# EAGLE board TinkCad_Circuit (EAGLE 9.7.0)

Size 262.16 x 178.18 mm. Coordinates in mm from the lower left corner, seen from the top.
Outline: 0,0 262.16,0 262.16,178.18 0,178.18 0,0
Copper layers (1*16): Top 0.035mm / dielectric 1.5mm / Bottom 0.035mm
Design rules "default": minimum track width 6mil, minimum drill 0.35mm, track to track 6mil, track to pad 6mil, pad to pad 6mil, via to via 6mil, smd to smd 6mil, copper to edge 40mil, drill to drill 6mil, minimum pad ring 10mil, minimum via ring 8mil, stop-mask expansion 4mil, vias tented up to drill 0mil, thermal gap 10mil

## Footprints (pad centres in the part's own frame; a part is rotated, then mirrored left to right if it is on the bottom)
LEDRD254W60D565H860B = drill 0.981 pad 1.581: 1 -1.27,0; 2 1.27,0
BATTERY-GENERIC = drill 1.118 pad 3.15 octagon: + 2.54,0; - -2.54,0
RESAD1016W63L850D250B = drill 0.83 pad 1.43: 1 -5.08,0; 2 5.08,0
SWITCH-SPDT-PTH-8.5X3.7MM = drill 1.016 pad 1.88: 1 -2.54,0; 2 0,0; 3 2.54,0
78B04ST = drill 0.8: 1 -3.81,-3.81; 2 -1.27,-3.81; 3 1.27,-3.81; 4 3.81,-3.81; 5 3.81,3.81; 6 1.27,3.81; 7 -1.27,3.81; 8 -3.81,3.81
DIP762W53P254L1969H508Q14B = drill 0.743 pad 1.343: 1 -3.81,7.62; 2 -3.81,5.08; 3 -3.81,2.54; 4 -3.81,0; 5 -3.81,-2.54; 6 -3.81,-5.08; 7 -3.81,-7.62; 8 3.81,-7.62; 9 3.81,-5.08; 10 3.81,-2.54; 11 3.81,0; 12 3.81,2.54; 13 3.81,5.08; 14 3.81,7.62

## Placement (x,y rotation side)
D1  RED  [LEDRD254W60D565H860B]  61.64,51.78 180 top
D3  RED  [LEDRD254W60D565H860B]  63.12,134.95 180 top
D4  RED  [LEDRD254W60D565H860B]  256.1,77.19 180 top
P1  BATTERYGENERIC  [BATTERY-GENERIC]  8.26,86.76 180 top
P3  BATTERYGENERIC  [BATTERY-GENERIC]  9.73,169.93 180 top
P4  BATTERYGENERIC  [BATTERY-GENERIC]  121.79,115.29 180 top
R1  1k  [RESAD1016W63L850D250B]  60.37,39.08 270 top
R3  1k  [RESAD1016W63L850D250B]  61.85,122.25 270 top
R8  1k  [RESAD1016W63L850D250B]  254.83,64.49 270 top
R9  1k  [RESAD1016W63L850D250B]  120.21,61.95 270 top
R10  1k  [RESAD1016W63L850D250B]  130.37,61.95 270 top
S4  TOGGLE  [SWITCH-SPDT-PTH-8.5X3.7MM]  122.75,77.19 0 top
S5  TOGGLE  [SWITCH-SPDT-PTH-8.5X3.7MM]  132.91,77.19 0 top
SW1  SPST-478B04ST  [78B04ST]  15.92,55.59 0 top
SW3  SPST-478B04ST  [78B04ST]  17.4,138.76 0 top
U1  74HC32_PDIP  [DIP762W53P254L1969H508Q14B]  37.51,55.59 90 top
U2  74HC86_PDIP  [DIP762W53P254L1969H508Q14B]  40.11,20.29 90 top
U5  74HC02_PDIP  [DIP762W53P254L1969H508Q14B]  36.45,138.76 90 top
U6  74HC00_PDIP  [DIP762W53P254L1969H508Q14B]  17.93,19.71 90 top
U7  74HC08_PDIP  [DIP762W53P254L1969H508Q14B]  17.47,8.86 90 top
U8  74HC04_PDIP  [DIP762W53P254L1969H508Q14B]  39.67,8.41 90 top
U10  74HC04_PDIP  [DIP762W53P254L1969H508Q14B]  198.95,81 90 top
U11  74HC00_PDIP  [DIP762W53P254L1969H508Q14B]  229.43,81 90 top
U12  74HC02_PDIP  [DIP762W53P254L1969H508Q14B]  176.09,81 90 top

## Library data of the parts
D1 D3 D4 = Tinkercad; CATEGORY: Opto-Electronic; SUB-CATEGORY: LED; VALUE: LED_RED
P1 P3 P4 R1 R3 R8-R10 S4 S5 SW1 SW3 U1 U2 U5-U8 U10-U12 = Tinkercad

## Nets
D1_C: D1.2 R1.1
D3_C: D3.2 R3.1
D4_C: D4.2 R8.1
P1+: P1.+ SW1.5 SW1.6 SW1.7 SW1.8 U1.14
P1-: P1.- R1.2
P3+: P3.+ SW3.5 SW3.6 SW3.7 SW3.8 U5.14
P3-: P3.- R3.2
P4+: P4.+ R9.2 R10.2 U10.14 U11.14 U12.14
P4-: P4.- R8.2 S4.2 S5.2 U10.7 U11.7 U12.7
U1_1A: SW1.1 U1.1
U1_1B: SW1.2 U1.2
U1_1Y: D1.1 U1.3
U5_1A: SW3.1 U5.2
U5_1B: SW3.2 U5.3
U5_1Y: D3.1 U5.1
U11_1A: U10.2 U11.1
U11_1B: U11.2 U12.1
U11_1Y: D4.1 U11.3
U12_1A: R9.1 S4.1 U12.2
U12_1B: R10.1 S5.1 U10.1 U12.3

## Tracks (layer width: path | path; a pad name or v marks a point on that pad's centre or on a via)
D1_C  (1 unrouted)
D3_C  (1 unrouted)
D4_C  (1 unrouted)
P1+  (5 unrouted)
P1-  (1 unrouted)
P3+  (5 unrouted)
P3-  (1 unrouted)
P4+  (5 unrouted)
P4-  (6 unrouted)
U1_1A  (1 unrouted)
U1_1B  (1 unrouted)
U1_1Y  (1 unrouted)
U5_1A  (1 unrouted)
U5_1B  (1 unrouted)
U5_1Y  (1 unrouted)
U11_1A  (1 unrouted)
U11_1B  (1 unrouted)
U11_1Y  (1 unrouted)
U12_1A  (2 unrouted)
U12_1B  (3 unrouted)